# Altium PCB PCB2.PcbDoc
Units mil, origin at the board's own origin, x right, y up, seen from the top; angles counter-clockwise.
Board outline 6000 x 4000 mil, 2 copper layers (Top Layer, Bottom Layer); 2 components, 4 nets, 40 pads, 0 vias.
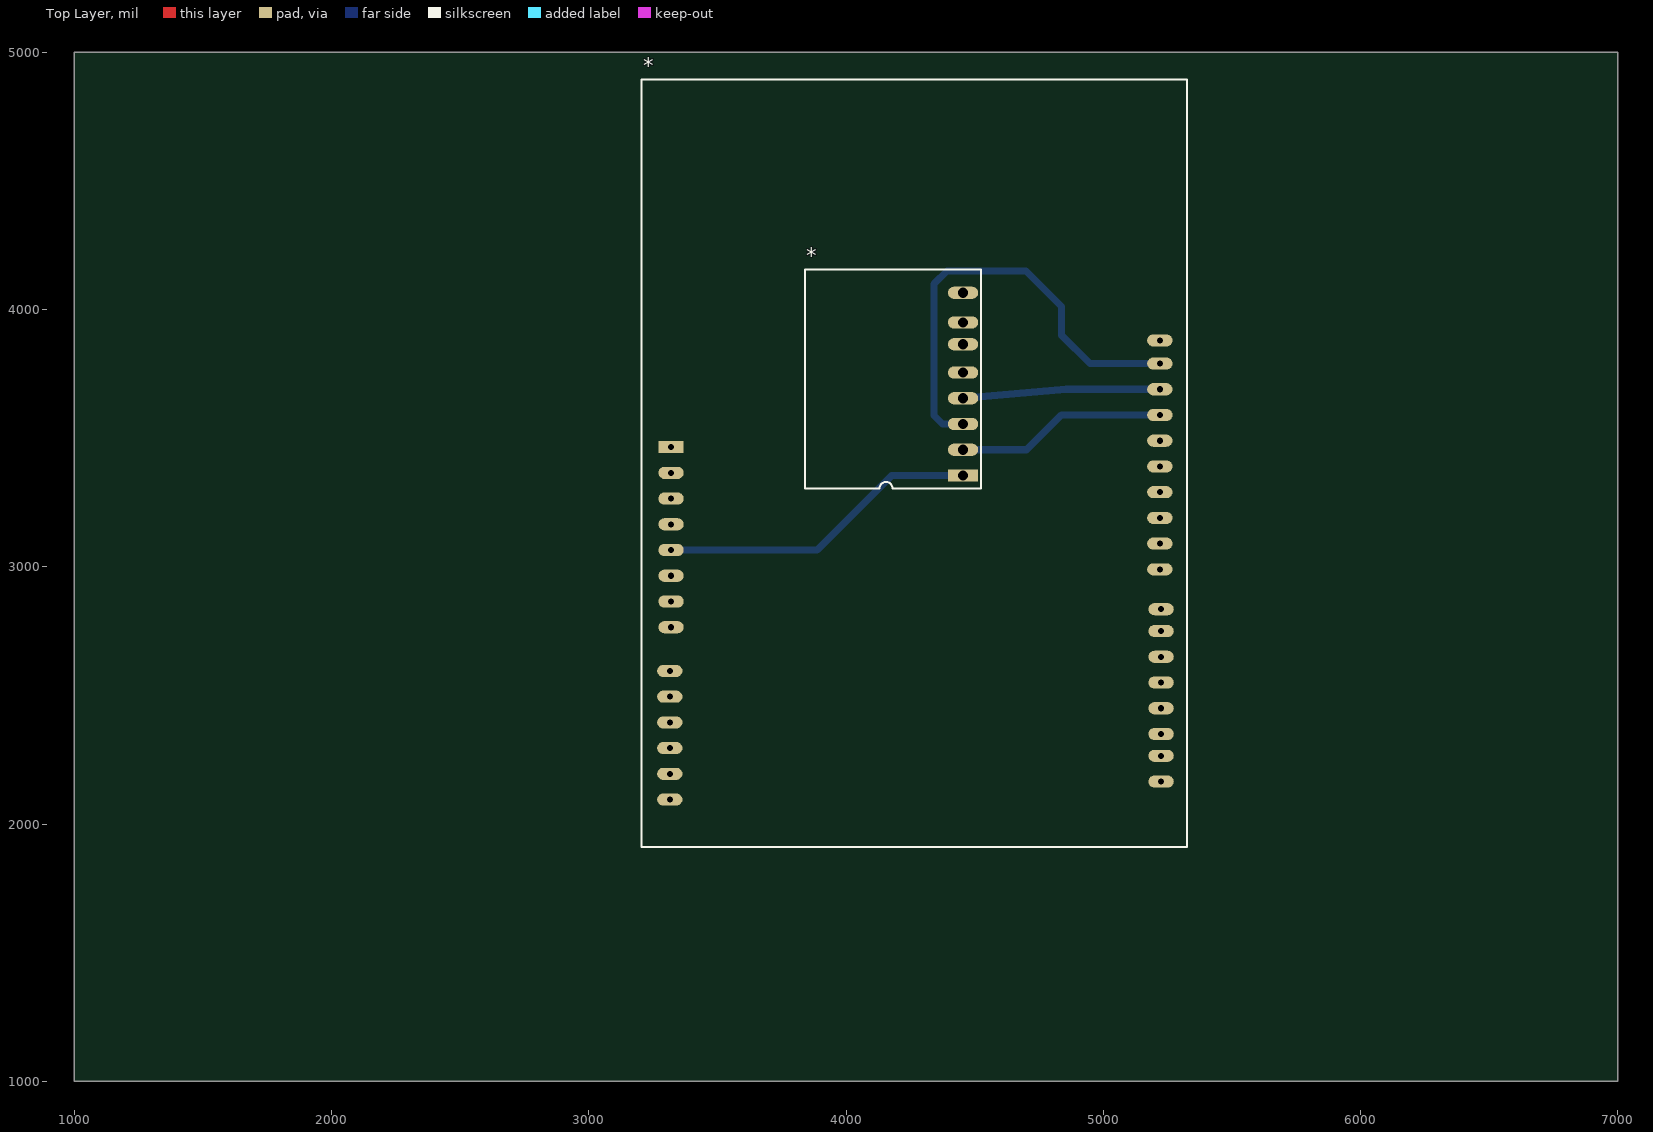
[diagram p0: Top Layer view]
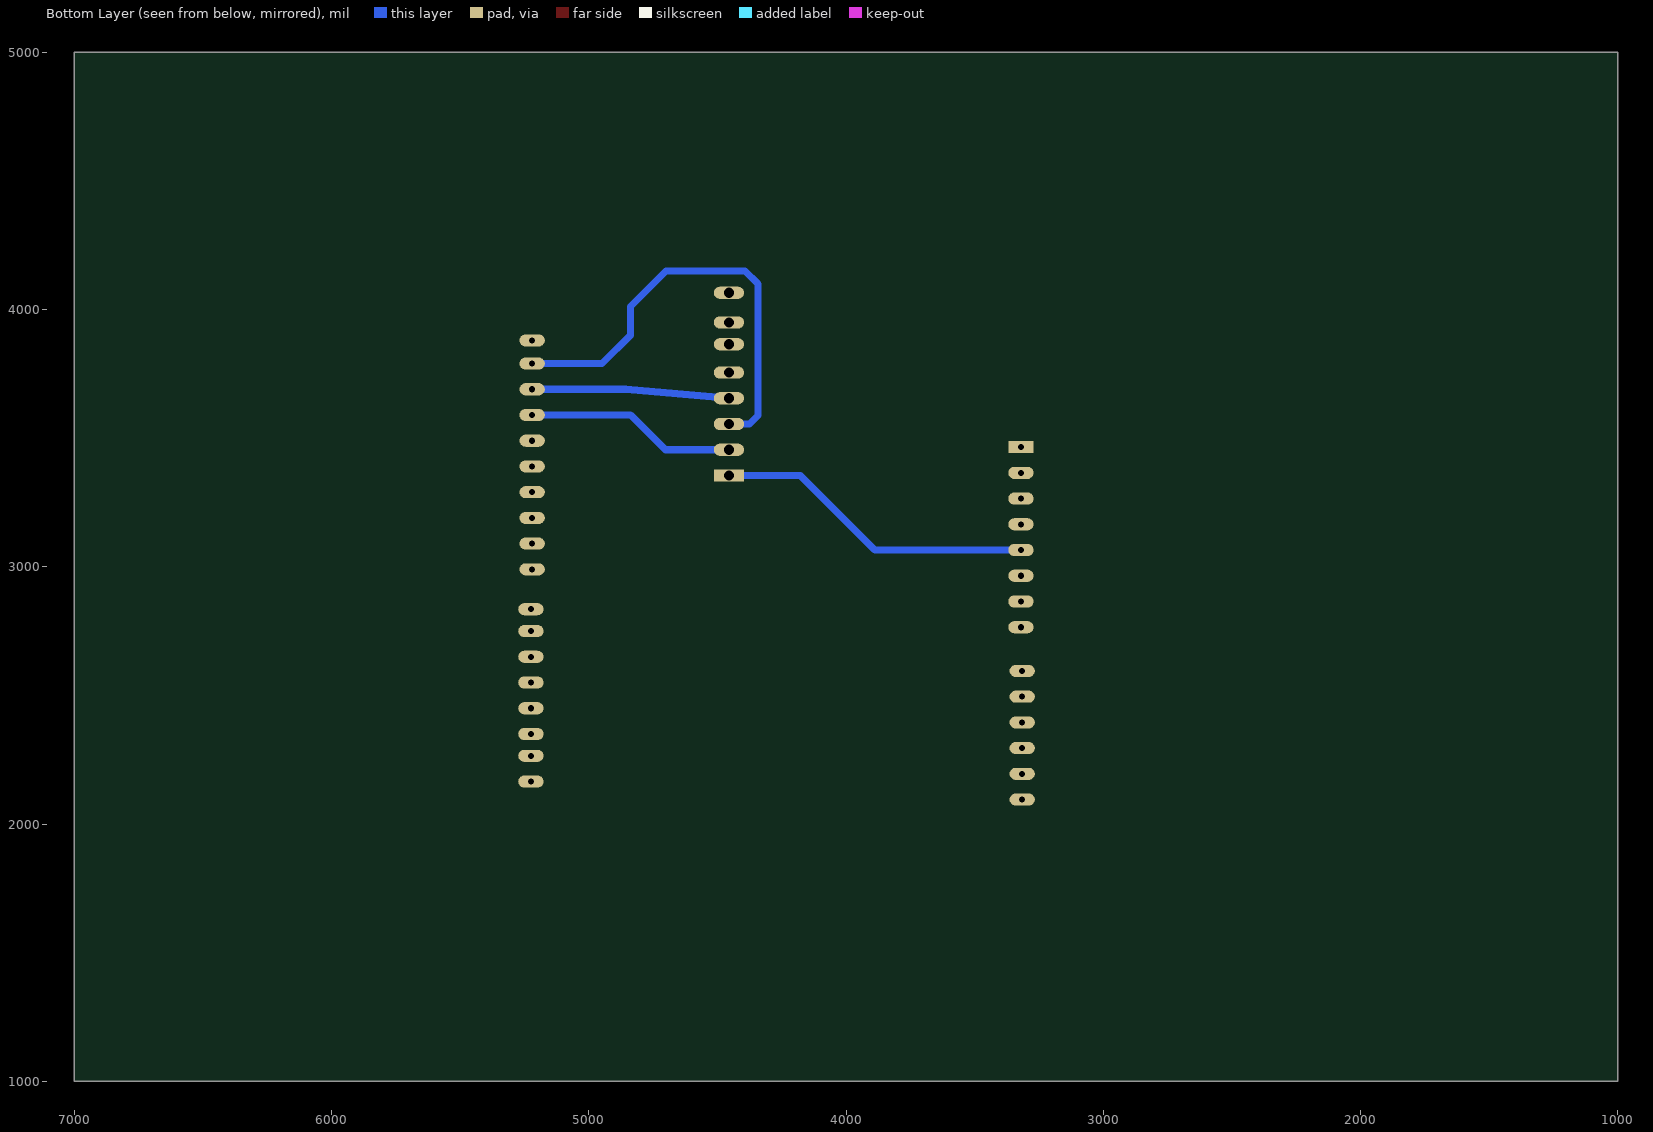
[diagram p1: Bottom Layer view, seen from below]

## Layer stack, top to bottom
Top Solder: solder mask 0.4, Solder Resist, Dk 3.5
Top Layer: signal copper 1.4
Dielectric 1: dielectric 12.6, FR-4, Dk 4.8
Bottom Layer: signal copper 1.4
Bottom Solder: solder mask 0.4, Solder Resist, Dk 3.5

## Board outline
1000,1000 7000,1000 7000,5000 1000,5000

## Design rules (kind name [scope] priority, off if disabled: settings)
Clearance [All] p1: gap=39.37 ignorepadtopadclearanceinfootprint=FALSE
PolygonConnect [All] p1: connectstyle=Direct reliefconductorwidth=10 reliefentries=4 polygonreliefangle="90 Angle" airgapwidth=10
RoomDefinition Sheet2 [InComponentClass('Sheet2')] p1: confinementstyle=ConfineIn formatcopy=TRUE lockcomponents=FALSE outline 2450,1900 5335,1900 5335,4985 2450,4985
RoutingLayers [All] p1: top layer_v5=FALSE bottom layer_v5=TRUE
RoutingVias [All] p1: holewidth=28 width=50 viastyle="Through Hole" minholewidth=28 minwidth=50 maxholewidth=28 maxwidth=50
SolderMaskExpansion [All] p1: expansion=4 istentingtop=FALSE
Width [All] p1: maxlimit=27.56 minlimit=27.56 preferedwidth=27.56
29 further rules are at their usual default settings.

## Classes and differential pairs
component class Sheet2: *

## Components (designator, comment, footprint, x,y, rotation, side; value= is the part's Value field where it differs from the comment)
* "MPU6050" mpu6050 4455,3355 r180 top
* "ARDUINO UNO" "ARDUINO UNO" 3320,3465 r0 top

## Footprints (in the part's own frame and the unit in brackets; to place one, negate y for a bottom-side part, rotate by r counter-clockwise, add the part's x,y. Pads: shape width x height; smd on the part's side, far side on the other; paste and mask are expansions set on the pad)
"ARDUINO UNO" [mm]
  rect 2.5x1.2 hole 0.6: 1(0,0)
  oval 2.5x1.2 hole 0.6: 2(0,-2.54) 3(0,-5.08) 4(0,-7.62) 5(0,-10.16) 6(0,-12.7) 7(0,-15.24) 8(0,-17.78) 9(-0.127,-22.098) 10(-0.127,-24.638) 11(-0.127,-27.178) 12(-0.127,-29.718) 13(-0.127,-32.258) 14(-0.127,-34.798) 15(48.387,-33.02) 16(48.387,-30.48) 17(48.387,-28.321) 18(48.387,-25.781) 19(48.387,-23.241) 20(48.387,-20.701) 21(48.387,-18.161) 22(48.387,-16.002) 23(48.26,-12.065) 24(48.26,-9.525) 25(48.26,-6.985) 26(48.26,-4.445) 27(48.26,-1.905) 28(48.26,0.635) 29(48.26,3.175) 30(48.26,5.715) 31(48.26,8.255) 32(48.26,10.541)
  silkscreen extent -2.92,-39.5 50.93,36.32, body extent -2.92,-39.13 50.67,36.08, height 2.49
mpu6050 [mm]
  rect 3x1.2 hole 1: 1(0,0)
  oval 3x1.2 hole 1: 2(0,-2.54) 3(0,-5.08) 4(0,-7.62) 5(0,-10.16) 6(0,-12.954) 7(0,-15.113) 8(0,-18.034)
  silkscreen extent -1.78,-20.32 15.62,1.27, body extent -0.76,-19.7 15.11,1.41, height 14.61

## Nets (pads, with @x,y where several pads share a name; then routed paths per layer and width w, separated by ;. In a path a pad name is that pad's centre, name@x,y a point inside that pad or via, vN(x,y) a via of type N, cw(c..) or ccw(c..) an arc to the next point about the centre after c; other vN are vias at no path point)
Net*_1: *.1@4455,3355 *.5@3320,3065 | length 1255.1
  Bottom Layer w27.56: *.5@3320,3065 3888,3065 4178,3355 *.1@4455,3355
Net*_2: *.2@4455,3455 *.29 | length 820.9
  Bottom Layer w27.56: *.2@4455,3455 4702,3455 4837,3590 *.29
Net*_3: *.3@4455,3555 *.31 | length 1752.1
  Bottom Layer w27.56: *.3@4455,3555 4375,3555 4342,3588 4342,4100 4392,4150 4700,4150 4838,4012 4838,3900 4948,3790 *.31
Net*_4: *.4@4455,3655 *.30 | length 766.5
  Bottom Layer w27.56: *.4@4455,3655 4856,3690 *.30
pads on no net: *.1@3320,3465 *.2@3320,3365 *.3@3320,3265 *.4@3320,3165 *.5@4455,3755 *.6 *.7 *.8 *.9 *.10 *.11 *.12 *.13 *.14 *.15 *.16 *.17 *.18 *.19 *.20 *.21 *.22 *.23 *.24 *.25 *.26 *.27 *.28 *.32